# Allegro board SCORING_GAME.brd
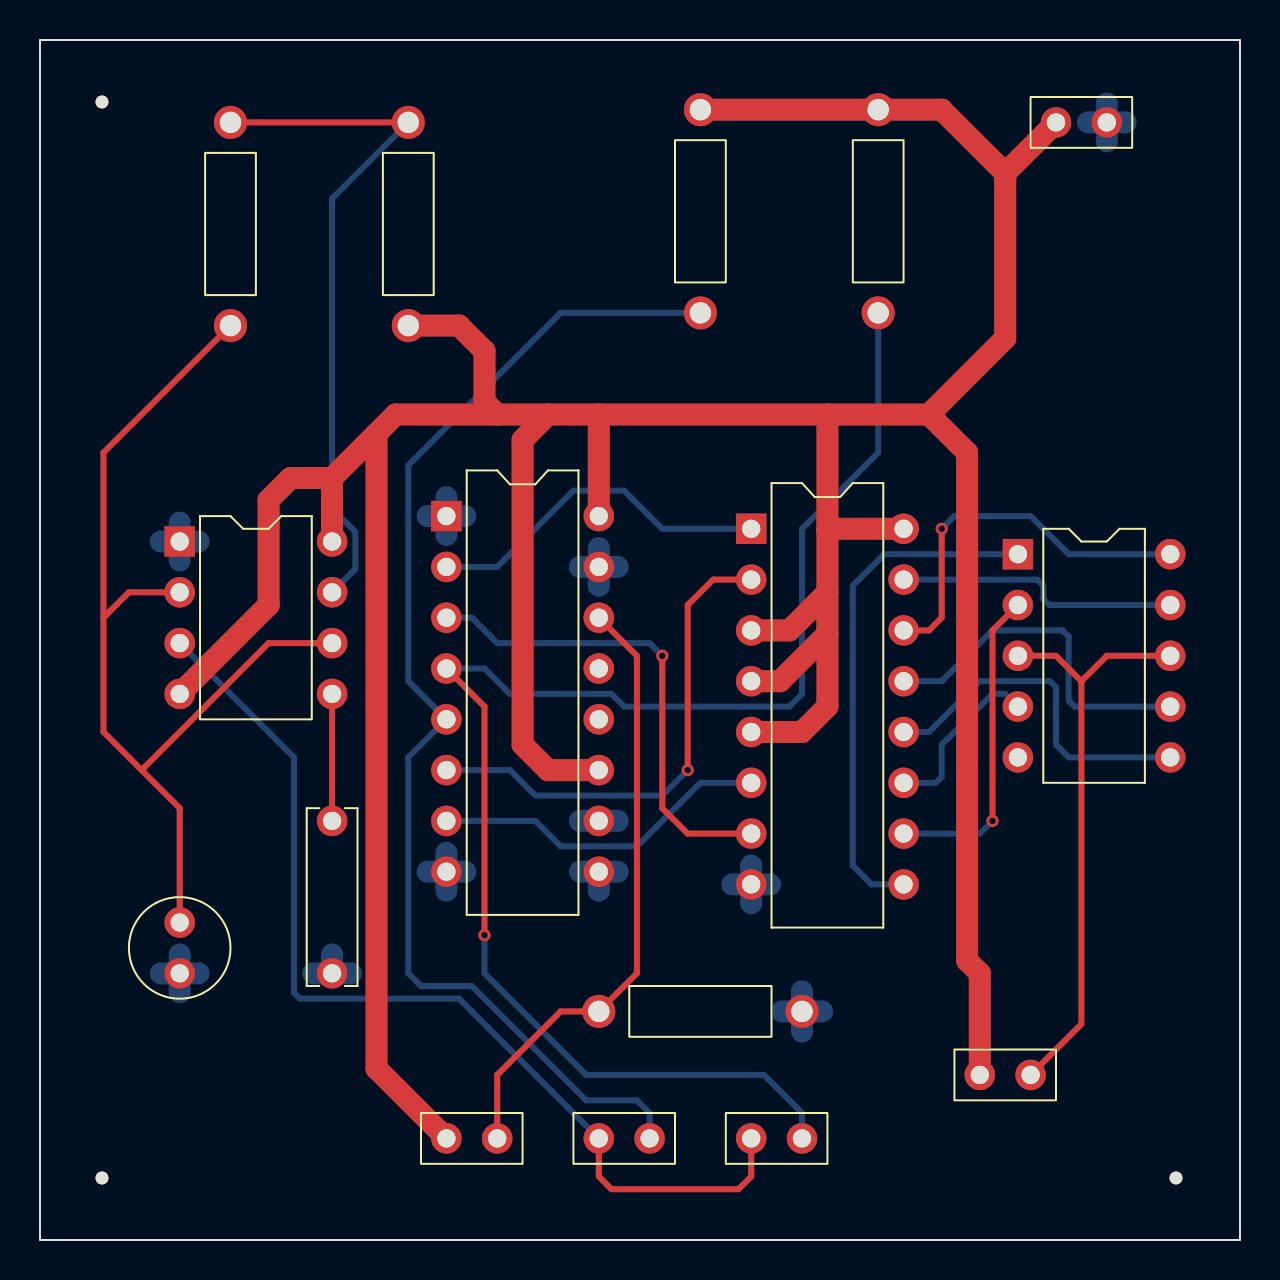
[diagram p0: board, top side]
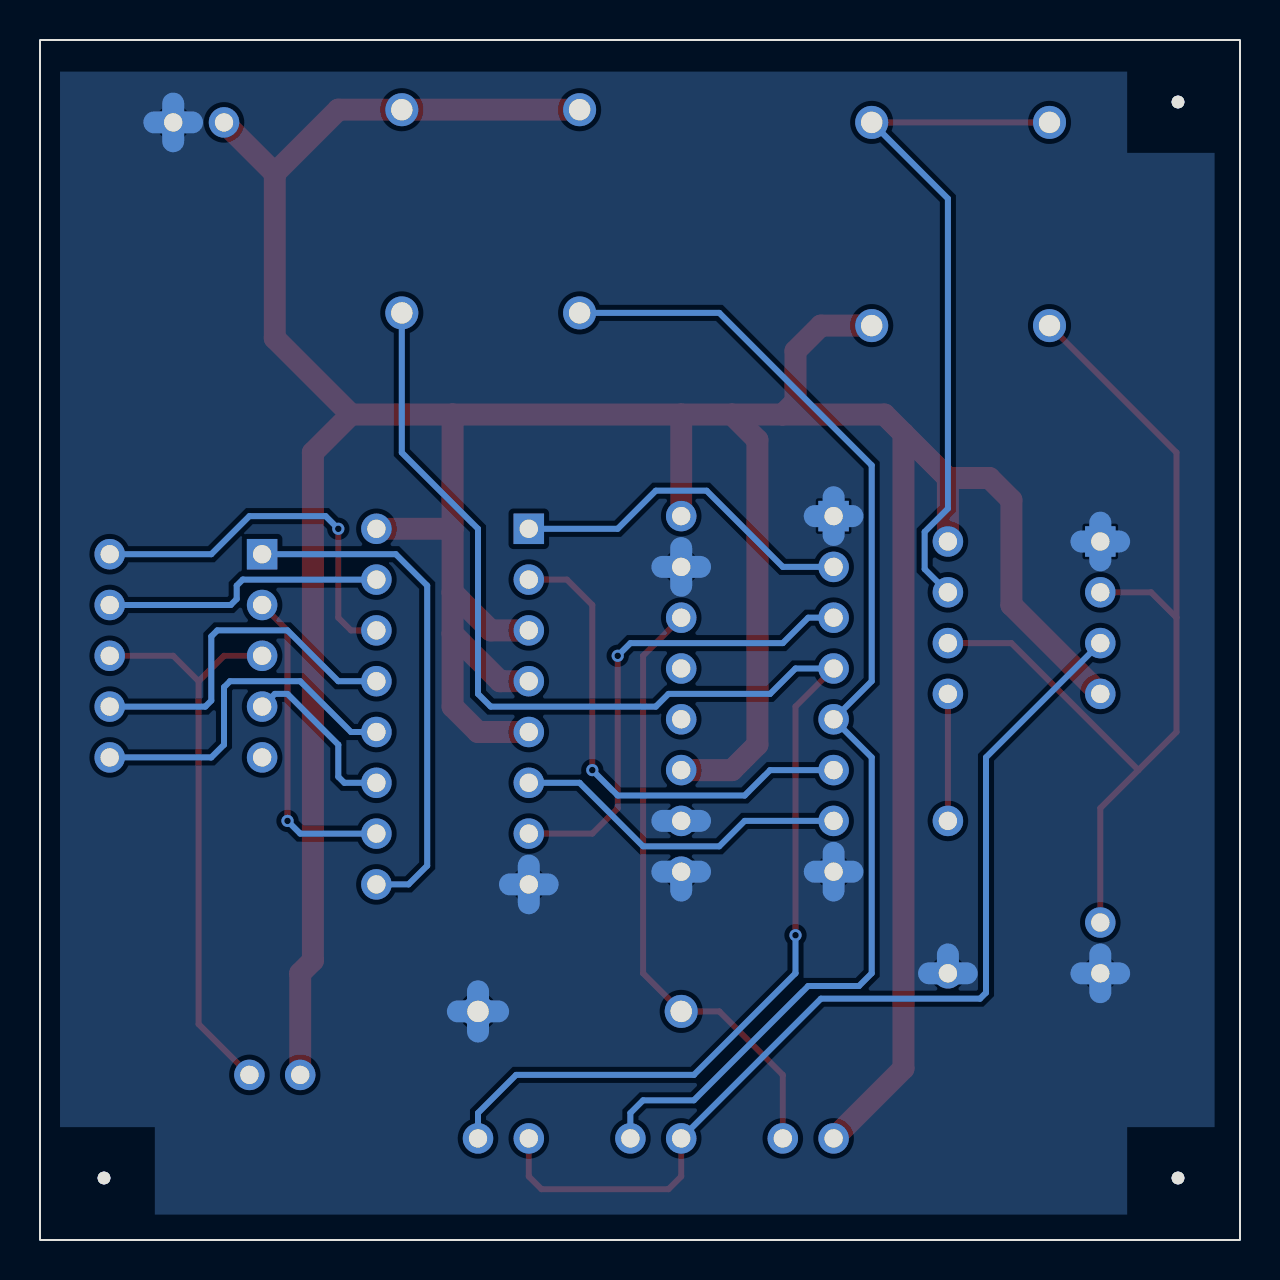
[diagram p1: board, bottom side, seen from below]

Outline 60 x 60 mm; copper layers: TOP, BOTTOM. Coordinates in mm from the lower left corner of the outline.
Outline path: rectangle 0,0 60,60

## Design rules (mm)
nets with their own width: min track width 0.3; nets N01195 N01207 N01511 N01523 N01527 N01531 N01535 N01542 N01554 N02177 N02285 N02297 N02420 N02432 N02628 N03215 N03513 N03684 N03737
nets with their own width: min track width 1.1; nets GND VCC

## Placement (name value [footprint] x y rotation side)
C1  0.01uF  [CAP300]  14.61 20.95 270 top
C2  2.2uF  [CAP196]  6.99 15.88 180 top
DS1  LTS-542  [DIP10_3]  48.9 34.29 0 top
IC1  NE555  [DIP8_3]  6.99 34.92 0 top
IC2  74LS192  [DIP16_3]  20.32 36.2 0 top
IC3  74LS247  [DIP16_3]  35.56 35.56 0 top
J1  VCC  [JUMPER2]  50.8 55.88 0 top
NOREF  -  [unnamed]  56.8 3.1 0 top
NOREF#2  -  [unnamed]  3.1 56.9 0 top
NOREF#3  -  [unnamed]  3.1 3.1 0 top
R1  100k  [RES400]  9.53 55.88 180 top
R2  10k  [RES400]  18.41 45.72 0 top
R3  1k  [RES400]  27.94 11.43 270 top
R4  560  [RES400]  33.02 56.52 180 top
R5  560  [RES400]  41.91 56.52 180 top
SW1  SW PUSHBUTTON  [JUMPER2]  20.32 5.08 0 top
SW2  SW PUSHBUTTON  [JUMPER2]  27.94 5.08 0 top
SW3  SW PUSHBUTTON  [JUMPER2]  35.56 5.08 0 top
SW4  SW PUSHBUTTON  [JUMPER2]  49.53 8.26 180 top

## Library data of the parts
C1 = CAP: Tolerance: ***; User Part Number: ***
C2 = CAP POL: Tolerance: ***; User Part Number: ***
DS1 = LTS-542_0: Tolerance: ***; User Part Number: ***
IC1 = NE555_7: Tolerance: ***; User Part Number: ***
IC2 = 74LS192_9: Tolerance: ***; User Part Number: ***
IC3 = 74LS247_8: Tolerance: ***; User Part Number: ***
J1 = CON2: User Part Number: ***
R1-R3 = R: Tolerance: ***; User Part Number: ***
R4 R5 = R_RES400_560: Tolerance: ***; User Part Number: ***
SW1-SW4 = SW PUSHBUTTON: User Part Number: ***

## Footprints (pads in the part's own frame, mm; a bottom-side part is the same pattern mirrored in y, then rotated)
CAP196
  round 1.524 hole 0.914: 1(0,0) 2(0,2.54)
CAP300
  round 1.524 hole 0.914: 1(0,0) 2(7.62,0)
DIP8_3
  rect 1.524x1.524 hole 0.914: 1(0,0)
  round 1.524 hole 0.914: 2(0,-2.54) 3(0,-5.08) 4(0,-7.62) 5(7.62,-7.62) 6(7.62,-5.08) 7(7.62,-2.54) 8(7.62,0)
DIP10_3
  rect 1.524x1.524 hole 0.914: 1(0,0)
  round 1.524 hole 0.914: 2(0,-2.54) 3(0,-5.08) 4(0,-7.62) 5(0,-10.16) 6(7.62,-10.16) 7(7.62,-7.62) 8(7.62,-5.08) 9(7.62,-2.54) 10(7.62,0)
DIP16_3
  rect 1.524x1.524 hole 0.914: 1(0,0)
  round 1.524 hole 0.914: 2(0,-2.54) 3(0,-5.08) 4(0,-7.62) 5(0,-10.16) 6(0,-12.7) 7(0,-15.24) 8(0,-17.78) 9(7.62,-17.78) 10(7.62,-15.24) 11(7.62,-12.7) 12(7.62,-10.16) 13(7.62,-7.62) 14(7.62,-5.08) 15(7.62,-2.54) 16(7.62,0)
JUMPER2
  round 1.524 hole 0.914: 1(0,0) 2(2.54,0)
RES400
  round 1.651 hole 1.067: 1(0,0) 2(0,10.16)
unnamed
  round 0.635 hole 3.175 unplated: (0,0)

## Nets
GND: C1.2 C2.2 IC1.1 IC2.1 IC2.8 IC2.9 IC2.10 IC2.15 IC3.8 J1.2 R3.2
VCC: IC1.4 IC1.8(VCC) IC2.11 IC2.16 IC3.3 IC3.4 IC3.5(R\B\I\) IC3.16 J1.1 R2.1 R4.1 R5.1 SW1.1 SW4.2
N01195: IC2.14 R3.1 SW1.2
N01207: IC1.3 SW2.1 SW3.1
N01511: DS1.7 IC3.13
N01523: DS1.6 IC3.12
N01527: DS1.4 IC3.11
N01531: DS1.2 IC3.10
N01535: DS1.1 IC3.9
N01542: DS1.9 IC3.15
N01554: DS1.10 IC3.14
N02177: DS1.3 DS1.8 SW4.1
N02285: IC2.7(Q3) IC3.6
N02297: IC2.6 IC3.2
N02420: IC2.2 IC3.1
N02432: IC2.3 IC3.7
N02628: IC2.4 R5.2 SW3.2
N03215: IC2.5 R4.2 SW2.2
N03513: IC1.7 R1.1 R2.2
N03684: C2.1 IC1.2 IC1.6 R1.2
N03737: C1.1 IC1.5

Pads without a net: DS1 5; IC2 12 13

## Via types
v1: diameter 0.61, hole 0.33, TOP to BOTTOM, 5 vias

## Routing (per net, layer and track width the routed paths; a pad name or vN(x,y) marks a point on that pad's centre or on a via; arc(x,y) is an arc through that point)
GND: length 37.9
  BOTTOM w1.1: 35.56,16.84 IC3.8 ; IC3.8 36.5,17.78 ; IC3.8 35.56,18.72 ; IC3.8 34.62,17.78 ; 27.94,32.71 IC2.15 ; IC2.15 28.88,33.66 ; IC2.15 27,33.66 ; IC2.15 27.94,34.6 ; 6.99,33.98 IC1.1 ; IC1.1 6.99,35.87 ; IC1.1 7.93,34.92 ; IC1.1 6.04,34.92 ; 38.1,10.42 R3.2 ; R3.2 38.1,12.44 ; R3.2 37.09,11.43 ; R3.2 39.11,11.43 ; J1.2 54.28,55.88 ; J1.2 53.34,56.82 ; J1.2 53.34,54.94 ; J1.2 52.4,55.88 ; 6.99,12.39 C2.2 ; C2.2 6.04,13.34 ; C2.2 6.99,14.28 ; C2.2 7.93,13.34 ; IC2.8 20.32,19.36 ; IC2.8 19.38,18.41 ; IC2.8 20.32,17.47 ; IC2.8 21.26,18.41 ; IC2.1 21.26,36.2 ; IC2.1 19.38,36.2 ; IC2.1 20.32,35.25 ; IC2.1 20.32,37.14 ; 27,18.41 IC2.9 ; IC2.9 28.88,18.41 ; IC2.9 27.94,17.47 ; 28.88,20.95 IC2.10 27,20.95 ; 14.61,13.34 14.61,14.28 ; 14.61,13.34 13.66,13.34 ; 14.61,13.34 15.55,13.34
VCC: length 220.4
  TOP w1.1: 25.4,41.27 22.86,41.27 ; 25.4,41.27 24.13,40.01 24.13,24.77 25.4,23.5 IC2.11 ; 25.4,41.27 27.94,41.27 ; 22.86,41.27 22.23,41.91 22.23,44.45 20.95,45.72 R2.1 ; 22.86,41.27 17.78,41.27 16.83,40.32 ; 14.61,38.1 12.53,38.1 11.43,37 11.43,31.75 IC1.4 ; 14.61,38.1 IC1.8 ; 14.61,38.1 16.83,40.32 ; IC2.16 27.94,41.27 ; 27.94,41.27 39.37,41.27 ; 44.45,41.27 46.35,39.37 46.35,13.97 46.99,13.34 SW4.2 ; 44.45,41.27 48.26,45.09 48.26,53.34 ; 44.45,41.27 39.37,41.27 ; 16.83,40.32 16.83,8.57 SW1.1 ; 39.37,30.31 37,27.94 IC3.4 ; 39.37,30.31 39.37,26.67 38.1,25.4 IC3.5 ; 39.37,30.31 39.37,32.38 ; 39.37,41.27 39.37,35.56 ; 48.26,53.34 45.09,56.52 R5.1 R4.1 ; 48.26,53.34 J1.1 ; IC3.3 37.47,30.48 39.37,32.38 ; 39.37,35.56 39.37,32.38 ; 39.37,35.56 IC3.16
N01195: length 30.8
  TOP w0.3: SW1.2 22.86,8.26 26.04,11.43 R3.1 29.84,13.34 29.84,29.21 IC2.14
N01207: length 50.1
  TOP w0.3: SW3.1 35.56,3.17 34.92,2.54 28.57,2.54 27.94,3.17 SW2.1
  BOTTOM w0.3: IC1.3 12.7,24.13 12.7,12.37 13,12.06 20.95,12.06 SW2.1
N01511: length 17.8
  BOTTOM w0.3: DS1.7 51.73,26.67 51.44,26.97 51.44,30.18 51.13,30.48 47.62,30.48 45.09,27.94 IC3.13
N01523: length 17.6
  BOTTOM w0.3: DS1.6 51.44,24.13 50.8,24.77 50.8,27.64 50.5,27.94 46.99,27.94 44.45,25.4 IC3.12
N01527: length 8.8
  BOTTOM w0.3: IC3.11 44.78,22.86 45.09,23.16 45.09,24.77 47.62,27.3 48.26,27.3 DS1.4
N01531: length 16
  TOP w0.3: DS1.2 47.62,30.48 v1(47.62,20.95)
  BOTTOM w0.3: IC3.10 46.99,20.32 v1(47.62,20.95)
N01535: length 25.8
  BOTTOM w0.3: DS1.1 42.21,34.29 40.64,32.72 40.64,18.71 41.58,17.78 IC3.9
N01542: length 14.3
  BOTTOM w0.3: IC3.15 49.87,33.02 50.16,32.72 50.16,32.05 50.47,31.75 DS1.9
N01554: length 19.1
  TOP w0.3: IC3.14 44.45,30.48 45.09,31.11 v1(45.09,35.56)
  BOTTOM w0.3: v1(45.09,35.56) 45.72,36.2 49.53,36.2 51.44,34.29 DS1.10
N02177: length 29.4
  TOP w0.3: SW4.1 52.07,10.79 52.07,27.94 ; 52.07,27.94 53.34,29.21 DS1.8 ; 52.07,27.94 50.8,29.21 DS1.3
N02285: length 17.1
  BOTTOM w0.3: IC2.7 24.77,20.95 26.04,19.68 29.85,19.68 33.02,22.86 IC3.6
N02297: length 25.1
  TOP w0.3: v1(32.38,23.5) 32.38,31.75 33.66,33.02 IC3.2
  BOTTOM w0.3: IC2.6 23.5,23.5 24.77,22.23 31.11,22.23 v1(32.38,23.5)
N02420: length 17.6
  BOTTOM w0.3: IC2.2 22.86,33.66 26.67,37.47 29.21,37.47 31.11,35.56 IC3.1
N02432: length 24.2
  TOP w0.3: v1(31.11,29.21) 31.11,21.59 32.38,20.32 IC3.7
  BOTTOM w0.3: IC2.3 21.59,31.11 22.86,29.84 30.48,29.84 v1(31.11,29.21)
N02628: length 75.5
  TOP w0.3: v1(22.23,15.24) 22.23,26.67 IC2.4
  BOTTOM w0.3: SW3.2 38.1,6.35 36.2,8.26 27.3,8.26 22.23,13.34 v1(22.23,15.24) ; R5.2 41.91,39.37 38.1,35.56 38.1,27.3 37.47,26.67 29.21,26.67 28.57,27.3 23.5,27.3 22.23,28.57 IC2.4
N03215: length 61
  BOTTOM w0.3: SW2.2 30.48,6.35 29.84,6.99 27.3,6.99 21.59,12.7 19.05,12.7 18.41,13.34 18.41,24.13 IC2.5 18.41,27.94 18.41,38.73 26.04,46.35 R4.2
N03513: length 34.9
  TOP w0.3: R2.2 R1.1
  BOTTOM w0.3: IC1.7 15.77,33.55 15.77,35.41 14.61,36.57 14.61,52.07 R2.2
N03684: length 50.5
  TOP w0.3: 3.17,31.11 3.17,25.4 5.08,23.5 ; 3.17,31.11 4.45,32.38 IC1.2 ; 3.17,31.11 3.17,39.37 R1.2 ; 5.08,23.5 6.99,21.59 C2.1 ; 5.08,23.5 11.43,29.84 IC1.6
N03737: length 6.4
  TOP w0.3: C1.1 IC1.5

## Copper pours and planes (outline as drawn; the poured copper is in the pictures)
GND on BOTTOM: 1.27,1.27 1.27,58.42 59,58.42 59,1.27 ; 2 cut-outs
